# EAGLE board Servosolenoidvalve_of_Tanbo (EAGLE 9.6.2), part 1 of 2
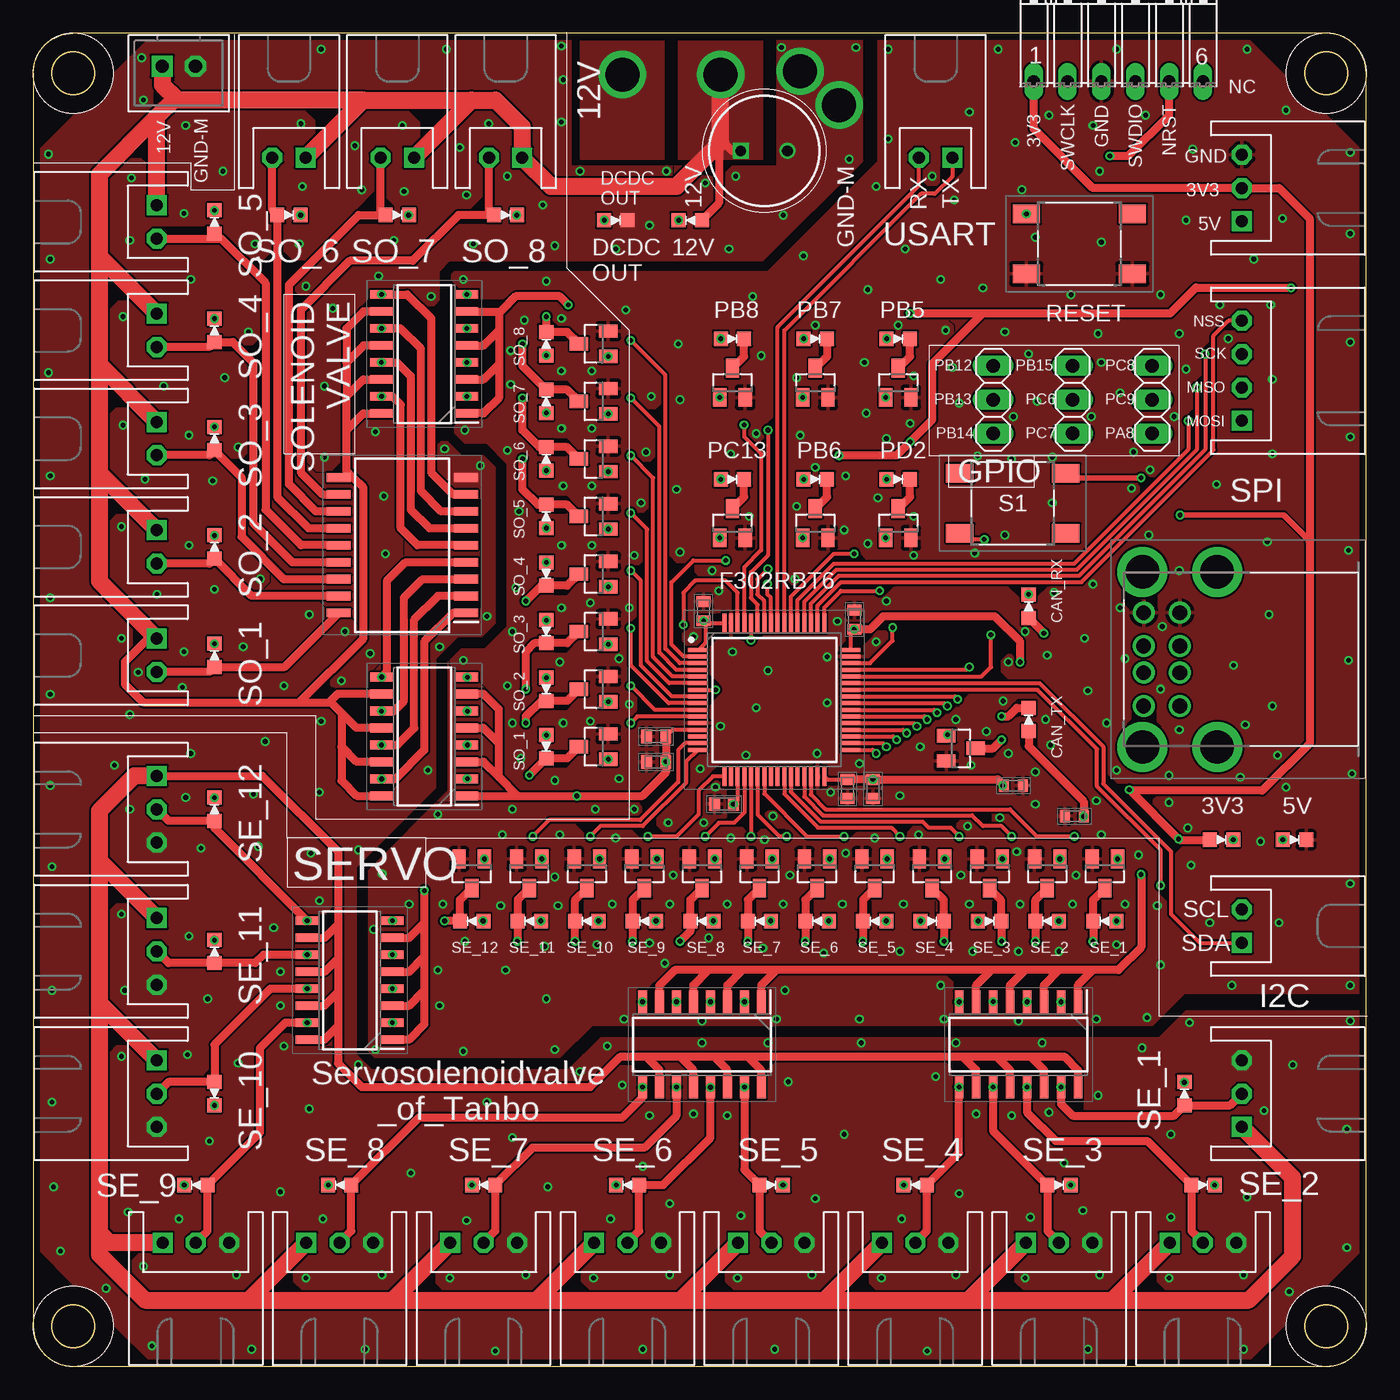
[diagram p0: board, top side]
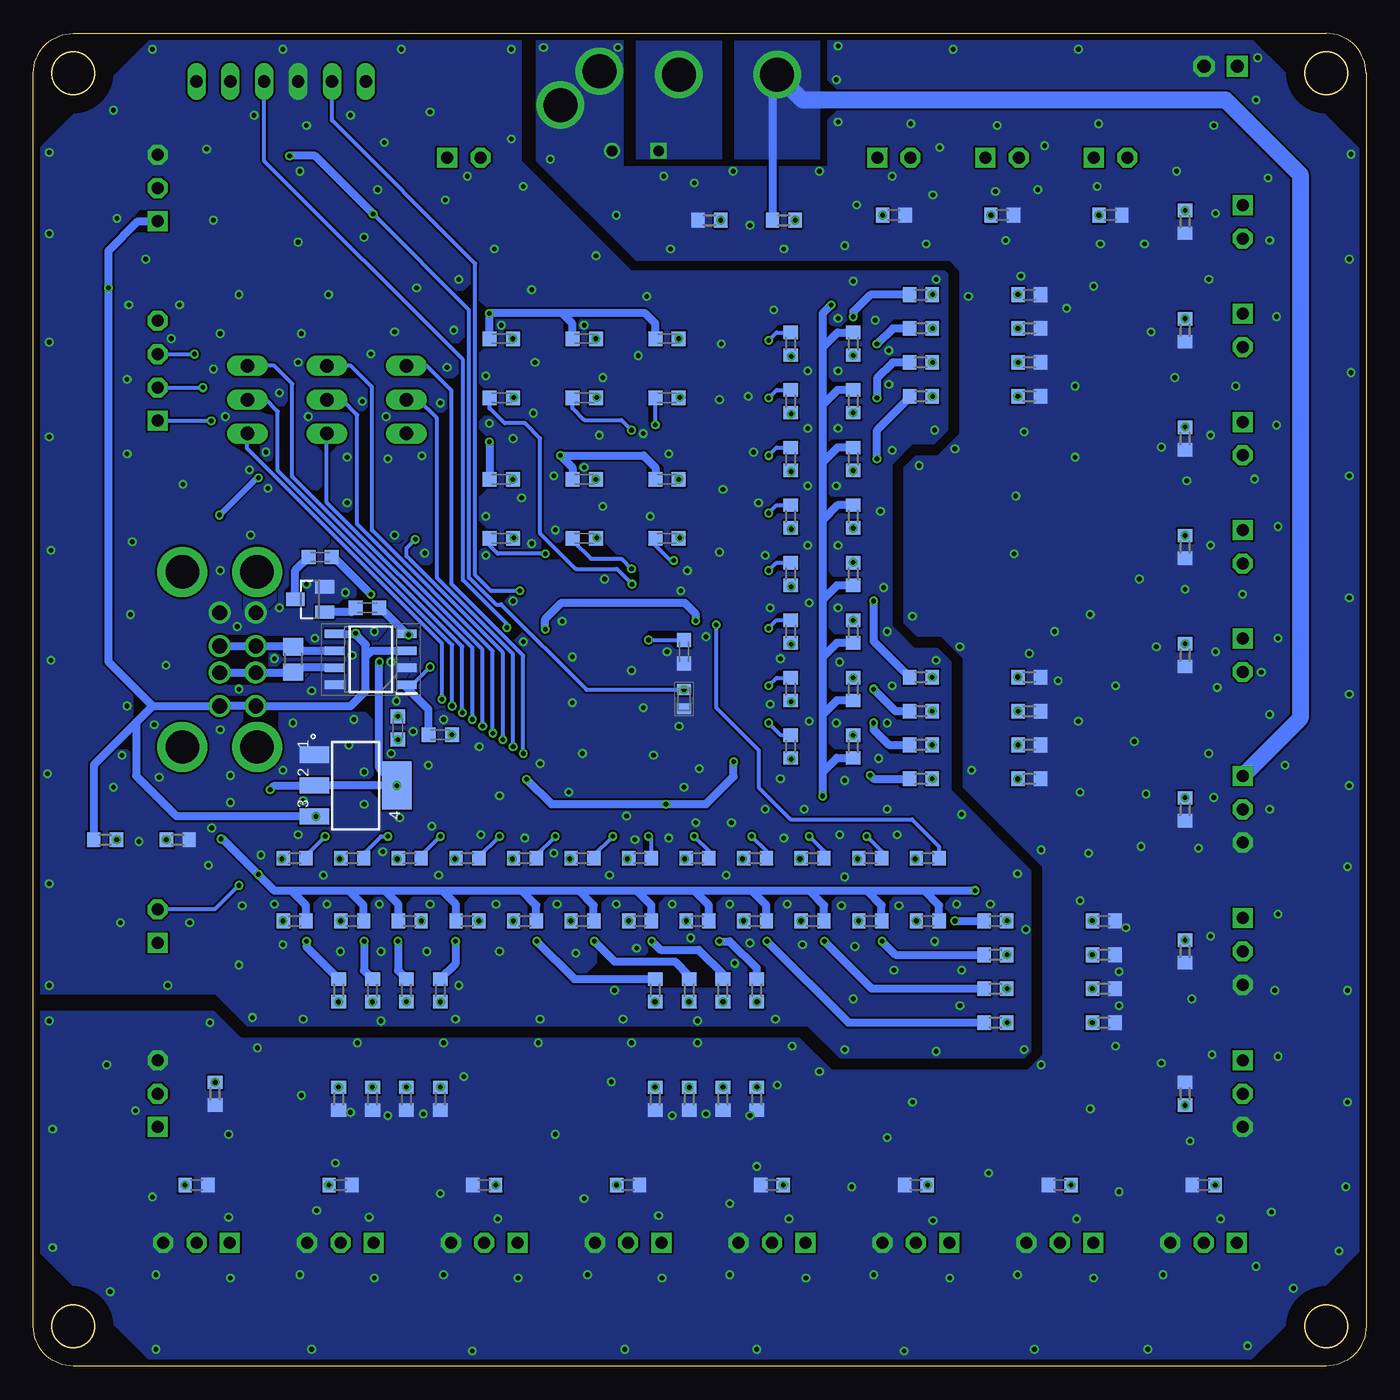
[diagram p1: board, bottom side, seen from below]

Size 100 x 100 mm. Coordinates in mm from the lower left corner, seen from the top.
Outline: 3,0 97,0 arc90 100,3 100,97 arc90 97,100 3,100 arc90 0,97 0,3 arc90 3,0
Outline: circle at 3,3 radius 1.6
Outline: circle at 3,97 radius 1.6
Outline: circle at 97,97 radius 1.6
Outline: circle at 97,3 radius 1.6
Copper layers (1*16): Top 0.035mm / dielectric 1.6mm / Bottom 0.035mm
Design rules "Elecrow_2-layer_PCB_eagle_rule": minimum track width 6mil, minimum drill 12mil, track to track 6mil, track to pad 6mil, pad to pad 6mil, via to via 8mil, smd to smd 0mil, copper to edge 20mil, drill to drill 10mil, minimum pad ring 6mil, minimum via ring 6mil, stop-mask expansion 0mil, vias tented up to drill 100mil, thermal gap 10mil
tRestrict: area 94,0 to 100,6; area 94,94 to 100,100; area 0,0 to 6,6; area 0,94 to 6,100; 340 lines
bRestrict: area 94,94 to 100,100; area 0,94 to 6,100; area 94,0 to 100,6; area 0,0 to 6,6; 281 lines

## Footprints (pad centres in the part's own frame; a part is rotated, then mirrored left to right if it is on the bottom)
CAPC1709X100N = smd 0.81 x 1.04: 1 -0.72,0; 2 0.72,0
CAPC1608X90N = smd 0.75 x 0.94: 1 -0.7,0; 2 0.7,0
CAPPRD350W60D825H1150 = drill 0.8 pad 1.2 square: 1 0,0 | drill 0.8 pad 1.2: 2 3.5,0
QFP50P1200X1200X160-64N = smd 1.475 x 0.3: 1 -5.738,3.75; 2 -5.738,3.25; 3 -5.738,2.75; 4 -5.738,2.25; 5 -5.738,1.75; 6 -5.738,1.25; 7 -5.738,0.75; 8 -5.738,0.25; 9 -5.738,-0.25; 10 -5.738,-0.75; 11 -5.738,-1.25; 12 -5.738,-1.75; 13 -5.738,-2.25; 14 -5.738,-2.75; 15 -5.738,-3.25; 16 -5.738,-3.75; 33 5.738,-3.75; 34 5.738,-3.25; 35 5.738,-2.75; 36 5.738,-2.25; 37 5.738,-1.75; 38 5.738,-1.25; 39 5.738,-0.75; 40 5.738,-0.25; 41 5.738,0.25; 42 5.738,0.75; 43 5.738,1.25; 44 5.738,1.75; 45 5.738,2.25; 46 5.738,2.75; 47 5.738,3.25; 48 5.738,3.75 | smd 0.3 x 1.475: 17 -3.75,-5.738; 18 -3.25,-5.738; 19 -2.75,-5.738; 20 -2.25,-5.738; 21 -1.75,-5.738; 22 -1.25,-5.738; 23 -0.75,-5.738; 24 -0.25,-5.738; 25 0.25,-5.738; 26 0.75,-5.738; 27 1.25,-5.738; 28 1.75,-5.738; 29 2.25,-5.738; 30 2.75,-5.738; 31 3.25,-5.738; 32 3.75,-5.738; 49 3.75,5.738; 50 3.25,5.738; 51 2.75,5.738; 52 2.25,5.738; 53 1.75,5.738; 54 1.25,5.738; 55 0.75,5.738; 56 0.25,5.738; 57 -0.25,5.738; 58 -0.75,5.738; 59 -1.25,5.738; 60 -1.75,5.738; 61 -2.25,5.738; 62 -2.75,5.738; 63 -3.25,5.738; 64 -3.75,5.738
SOIC127P600X175-8N = smd 1.5 x 0.65: 1 -2.7,1.905; 2 -2.7,0.635; 3 -2.7,-0.635; 4 -2.7,-1.905; 5 2.7,-1.905; 6 2.7,-0.635; 7 2.7,0.635; 8 2.7,1.905
SOP128P700X220-16N = smd 1.7 x 0.65: 1 -3.2,4.462; 2 -3.2,3.188; 3 -3.2,1.912; 4 -3.2,0.638; 5 -3.2,-0.638; 6 -3.2,-1.912; 7 -3.2,-3.188; 8 -3.2,-4.462; 9 3.2,-4.462; 10 3.2,-3.188; 11 3.2,-1.912; 12 3.2,-0.638; 13 3.2,0.638; 14 3.2,1.912; 15 3.2,3.188; 16 3.2,4.462
SOIC127P1030X245-18N = smd 1.8 x 0.65: 1 -4.775,5.08; 2 -4.775,3.81; 3 -4.775,2.54; 4 -4.775,1.27; 5 -4.775,0; 6 -4.775,-1.27; 7 -4.775,-2.54; 8 -4.775,-3.81; 9 -4.775,-5.08; 10 4.775,-5.08; 11 4.775,-3.81; 12 4.775,-2.54; 13 4.775,-1.27; 14 4.775,0; 15 4.775,1.27; 16 4.775,2.54; 17 4.775,3.81; 18 4.775,5.08
USB4AF203AS = drill 1.1 pad 1.65: 1 0,0; 2 2.5,0; 3 4.5,0; 4 7,0; 5 0,-2.71; 6 2.5,-2.71; 7 4.5,-2.71; 8 7,-2.71 | drill 2.5 pad 3.75: MH1 -3.07,0.09; MH2 10.07,0.09; MH3 -3.07,-5.51; MH4 10.07,-5.51
1X03 = drill 1.016 long: 1 -2.54,0; 2 0,0; 3 2.54,0
LED1608 = smd 1.05 x 1.08: A -0.875,0; K 0.875,0
SOT-23 = smd 1 x 1.4: 1 -0.95,-1.1; 2 0.95,-1.1; 3 0,1.1
1608 = smd 1.05 x 1.08: 1 -0.875,0; 2 0.875,0
R0603 = smd 1 x 1.1: 1 -0.85,0; 2 0.85,0
R0805 = smd 1.3 x 1.5: 1 -0.95,0; 2 0.95,0
SMD1608 = smd 1.05 x 1.08: 1 -0.875,0; 2 0.875,0
TSHAT25B219E = smd 2.05 x 1.4: A1 -3.975,2.25; B1 3.975,2.25; C1 -3.975,-2.25; D1 3.975,-2.25
06PA = drill 0.914 long: 1 -6.35,0; 2 -3.81,0; 3 -1.27,0; 4 1.27,0; 5 3.81,0; 6 6.35,0
SOT223 = smd 2.235 x 1.219: 1 -3.099,2.311; 2 -3.099,0; 3 -3.099,-2.311 | smd 2.2 x 3.6: 4 3.099,0
S2B-XH-A = drill 0.9 pad 1.5 square: 1 1.25,0 | drill 0.9 pad 1.5 octagon: 2 -1.25,0
S3B-XH-A = drill 0.9 pad 1.5 square: 1 2.5,0 | drill 0.9 pad 1.5 octagon: 2 0,0; 3 -2.5,0
S4B-XH-A = drill 0.9 pad 1.5 square: 1 3.75,0 | drill 0.9 pad 1.5 octagon: 2 1.25,0; 3 -1.25,0; 4 -3.75,0
B2B-XH-A = drill 1 pad 1.6 square: 1 1.25,0 | drill 1 pad 1.6 octagon: 2 -1.25,0

## Placement (x,y rotation side)
C1  100n  [CAPC1709X100N]  51.82,42.16 0 top
C2  10uF  [CAPC1608X90N]  73.53,43.56 180 top
C5  25PK470MEFC8X11.5  [CAPPRD350W60D825H1150]  53.09,91.19 0 top
C9  100n  [CAPC1709X100N]  61.59,56.01 270 top
C10  100n  [CAPC1709X100N]  50.29,56.64 270 top
C11  100n  [CAPC1709X100N]  61.09,43.31 90 top
C17  4.7u  [CAPC1709X100N]  62.99,43.31 90 top
C18  10n  [CAPC1709X100N]  46.74,47.24 0 top
C19  1u  [CAPC1709X100N]  46.74,45.34 0 top
C22  100n  [CAPC1608X90N]  78.11,41.27 0 top
C23  0.1u  [CAPC1709X100N]  51.18,50.04 90 bottom
IC1  STM32F302RBT6  [QFP50P1200X1200X160-64N]  55.59,50 0 top
IC2  NCV7351D1ER2G  [SOIC127P600X175-8N]  74.68,53.04 180 bottom
IC4  TLP293-4_GB  [SOP128P700X220-16N]  50.16,24.13 270 top
IC5  TLP293-4_GB  [SOP128P700X220-16N]  23.75,28.96 180 top
IC6  TD62083AFG,N,EL  [SOIC127P1030X245-18N]  27.69,61.59 180 top
IC7  TLP293-4_GB  [SOP128P700X220-16N]  29.34,47.24 180 top
IC8  TLP293-4_GB  [SOP128P700X220-16N]  29.34,75.95 180 top
IC9  TLP293-4_GB  [SOP128P700X220-16N]  73.91,24.13 270 top
J2  USB-4AF203AS  [USB4AF203AS]  83.31,49.53 90 top
JP1  [1X03]  83.95,72.52 90 top
JP2  [1X03]  77.98,72.52 90 top
JP3  [1X03]  72.01,72.52 90 top
LED1  LED1608  [LED1608]  13.59,53.34 90 top
LED2  LED1608  [LED1608]  94.61,39.5 0 top
LED3  LED1608  [LED1608]  89.15,39.5 0 top
LED4  LED1608  [LED1608]  13.59,61.47 90 top
LED5  LED1608  [LED1608]  13.59,69.6 90 top
LED6  LED1608  [LED1608]  86.36,20.45 90 top
LED7  LED1608  [LED1608]  67.44,33.4 0 top
LED8  LED1608  [LED1608]  87.76,13.59 0 top
LED9  LED1608  [LED1608]  13.59,77.72 90 top
LED10  LED1608  [LED1608]  13.59,85.85 90 top
LED11  LED1608  [LED1608]  19.18,86.36 0 top
LED12  LED1608  [LED1608]  27.3,86.36 0 top
LED13  LED1608  [LED1608]  35.43,86.36 0 top
LED14  LED1608  [LED1608]  64.9,66.55 0 top
LED15  LED1608  [LED1608]  64.9,77.09 0 top
LED16  LED1608  [LED1608]  58.67,66.55 0 top
LED17  LED1608  [LED1608]  58.67,77.09 0 top
LED18  LED1608  [LED1608]  76.96,13.59 0 top
LED19  LED1608  [LED1608]  66.17,13.59 180 top
LED20  LED1608  [LED1608]  55.37,13.59 0 top
LED21  LED1608  [LED1608]  38.48,68.07 90 top
LED22  LED1608  [LED1608]  38.48,72.39 90 top
LED23  LED1608  [LED1608]  38.48,76.71 90 top
LED24  LED1608  [LED1608]  38.48,46.48 270 top
LED25  LED1608  [LED1608]  38.48,50.8 270 top
LED26  LED1608  [LED1608]  38.48,55.12 270 top
LED27  LED1608  [LED1608]  38.48,59.44 270 top
LED28  LED1608  [LED1608]  44.58,13.59 180 top
LED29  LED1608  [LED1608]  52.45,77.09 0 top
LED30  LED1608  [LED1608]  33.78,13.59 180 top
LED31  LED1608  [LED1608]  22.99,13.59 180 top
LED32  LED1608  [LED1608]  41.53,33.4 180 top
LED33  LED1608  [LED1608]  63.12,33.4 180 top
LED34  LED1608  [LED1608]  37.21,33.4 180 top
LED35  LED1608  [LED1608]  80.39,33.4 180 top
LED36  LED1608  [LED1608]  54.48,33.4 180 top
LED37  LED1608  [LED1608]  76.07,33.4 180 top
LED38  LED1608  [LED1608]  50.16,33.4 180 top
LED39  LED1608  [LED1608]  38.48,63.75 90 top
LED40  LED1608  [LED1608]  52.45,66.55 0 top
LED41  LED1608  [LED1608]  49.28,85.98 180 top
LED42  LED1608  [LED1608]  58.8,33.4 180 top
LED43  LED1608  [LED1608]  32.89,33.4 180 top
LED44  LED1608  [LED1608]  71.75,33.4 0 top
LED45  LED1608  [LED1608]  45.85,33.4 180 top
LED46  LED1608  [LED1608]  12.19,13.59 180 top
LED47  LED1608  [LED1608]  13.59,20.45 270 top
LED48  LED1608  [LED1608]  13.59,31.11 90 top
LED49  LED1608  [LED1608]  13.59,41.78 90 top
LED50  LED1608  [LED1608]  43.69,85.98 0 top
LED51-G  LED1608  [LED1608]  74.68,48.51 90 top
LED52-Y  LED1608  [LED1608]  74.68,57.02 90 top
Q9  SOT-23_NMOS  [SOT-23]  69.6,46.35 270 top
Q10  SOT-23_NMOS  [SOT-23]  79.25,57.53 90 bottom
R1  10k  [1608]  51.18,53.59 270 bottom
R2  1k  [R0603]  94.61,39.5 0 bottom
R3  1k  [R0603]  89.15,39.5 0 bottom
R4  300  [R0603]  33.4,44.07 180 bottom
R5  120  [R0805]  80.52,53.04 270 bottom
R6  300  [R0603]  33.4,46.61 180 bottom
R7  300  [R0603]  33.4,49.15 180 bottom
R8  300  [R0603]  33.4,51.69 180 bottom
R9  10k  [SMD1608]  52.45,72.64 0 bottom
R10  1k  [SMD1608]  52.45,77.09 0 bottom
R11  10k  [SMD1608]  52.45,62.1 0 bottom
R12  1k  [R0603]  25.27,44.07 180 bottom
R13  1k  [R0603]  25.27,46.61 180 bottom
R14  1k  [R0603]  25.27,49.15 180 bottom
R15  1k  [R0603]  25.27,51.69 180 bottom
R16  1k  [R0603]  25.27,72.77 180 bottom
R17  1k  [R0603]  25.27,75.31 180 bottom
R18  1k  [R0603]  25.27,77.85 180 bottom
R19  1k  [R0603]  25.27,80.39 180 bottom
R20  1k  [SMD1608]  52.45,66.55 0 bottom
R21  300  [R0603]  33.4,72.77 180 bottom
R22  300  [R0603]  33.4,75.31 180 bottom
R23  300  [R0603]  33.4,77.85 180 bottom
R24  300  [R0603]  33.4,80.39 180 bottom
R25  10k  [R0603]  49.28,85.98 180 bottom
R26  300  [R0603]  27.81,25.78 180 bottom
R27  300  [R0603]  27.81,28.32 180 bottom
R28  300  [R0603]  27.81,30.86 180 bottom
R29  300  [R0603]  77.09,28.19 90 bottom
R30  300  [R0603]  74.55,28.19 90 bottom
R31  300  [R0603]  72.01,28.19 90 bottom
R32  300  [R0603]  69.47,28.19 90 bottom
R33  1k  [R0603]  77.09,20.07 90 bottom
R34  1k  [R0603]  74.55,20.07 90 bottom
R35  1k  [R0603]  72.01,20.07 90 bottom
R36  1k  [R0603]  69.47,20.07 90 bottom
R37  300  [R0603]  53.34,28.19 90 bottom
R38  300  [R0603]  50.8,28.19 90 bottom
R39  300  [R0603]  48.26,28.19 90 bottom
R40  300  [R0603]  45.72,28.19 90 bottom
R41  1k  [R0603]  53.34,20.07 90 bottom
R42  1k  [R0603]  50.8,20.07 90 bottom
R43  1k  [R0603]  48.26,20.07 90 bottom
R44  1k  [R0603]  45.72,20.07 90 bottom
R45  1k  [R0603]  38.48,46.48 90 bottom
R46  10k  [R0603]  13.59,53.34 270 bottom
R47  10k  [R0603]  13.59,61.47 270 bottom
R48  10k  [R0603]  13.59,69.6 270 bottom
R49  10k  [R0603]  13.59,77.72 270 bottom
R50  10k  [R0603]  13.59,85.85 270 bottom
R51  10k  [R0603]  19.18,86.36 0 bottom
R52  10k  [R0603]  27.3,86.36 0 bottom
R53  10k  [R0603]  35.43,86.36 0 bottom
R54  1k  [R0603]  43.18,46.48 270 bottom
R55  1k  [R0603]  38.48,50.8 90 bottom
R56  1k  [R0603]  43.18,50.8 270 bottom
R57  1k  [R0603]  38.48,55.12 90 bottom
R58  1k  [R0603]  43.18,55.12 270 bottom
R59  10k  [SMD1608]  64.9,62.1 0 bottom
R60  1k  [SMD1608]  64.9,66.55 0 bottom
R61  10k  [SMD1608]  64.9,72.64 0 bottom
R62  1k  [SMD1608]  64.9,77.09 0 bottom
R63  10k  [SMD1608]  58.67,62.1 0 bottom
R64  1k  [SMD1608]  58.67,66.55 0 bottom
R65  10k  [SMD1608]  58.67,72.64 0 bottom
R66  1k  [SMD1608]  58.67,77.09 0 bottom
R67  1k  [R0603]  38.48,59.44 90 bottom
R68  1k  [R0603]  43.18,59.44 270 bottom
R69  1k  [R0603]  38.48,63.75 270 bottom
R70  1k  [R0603]  43.18,63.75 270 bottom
R71  1k  [R0603]  38.48,68.07 270 bottom
R72  1k  [R0603]  43.18,68.07 270 bottom
R73  1k  [R0603]  38.48,72.39 270 bottom
R74  1k  [R0603]  43.18,72.39 270 bottom
R75  1k  [R0603]  38.48,76.71 270 bottom
R76  1k  [R0603]  43.18,76.71 270 bottom
R77  1k  [R0603]  80.39,33.4 180 bottom
R78  1k  [R0603]  86.36,20.45 270 bottom
R79  1k  [R0603]  87.76,13.59 0 bottom
R80  1k  [R0603]  76.96,13.59 0 bottom
R81  1k  [R0603]  66.17,13.59 180 bottom
R82  1k  [R0603]  55.37,13.59 0 bottom
R83  1k  [R0603]  44.58,13.59 180 bottom
R84  1k  [R0603]  33.78,13.59 180 bottom
R85  1k  [R0603]  22.99,13.59 180 bottom
R86  1k  [R0603]  80.39,38.1 180 bottom
R87  1k  [R0603]  54.48,33.4 180 bottom
R88  1k  [R0603]  54.48,38.1 180 bottom
R89  1k  [R0603]  76.07,33.4 180 bottom
R90  1k  [R0603]  76.07,38.1 180 bottom
R91  1k  [R0603]  50.16,33.4 180 bottom
R92  1k  [R0603]  50.16,38.1 180 bottom
R93  1k  [R0603]  67.44,33.4 0 bottom
R94  1k  [R0603]  67.44,38.1 180 bottom
R95  1k  [R0603]  41.53,33.4 180 bottom
R96  1k  [R0603]  41.53,38.1 180 bottom
R97  1k  [R0603]  63.12,33.4 180 bottom
R98  1k  [R0603]  63.12,38.1 180 bottom
R99  1k  [R0603]  37.21,33.4 180 bottom
R100  1k  [R0603]  37.21,38.1 180 bottom
R101  300  [R0603]  27.81,33.4 180 bottom
R102  1k  [R0603]  19.68,25.78 180 bottom
R103  1k  [R0603]  19.68,28.32 180 bottom
R104  1k  [R0603]  19.68,30.86 180 bottom
R105  1k  [R0603]  19.68,33.4 180 bottom
R106  1k  [R0603]  71.75,33.4 0 bottom
R107  1k  [R0603]  71.75,38.1 180 bottom
R108  1k  [R0603]  45.85,33.4 180 bottom
R109  1k  [R0603]  45.85,38.1 180 bottom
R110  1k  [R0603]  58.8,33.4 180 bottom
R111  1k  [R0603]  58.8,38.1 180 bottom
R112  1k  [R0603]  32.89,33.4 180 bottom
R113  1k  [R0603]  32.89,38.1 180 bottom
R114  1k  [R0603]  12.19,13.59 180 bottom
R115  1k  [R0603]  13.59,20.45 90 bottom
R116  1k  [R0603]  13.59,31.11 270 bottom
R117  1k  [R0603]  13.59,41.78 270 bottom
R118  1k  [R0603]  43.69,85.98 0 bottom
R119  1k  [SMD1608]  72.64,47.88 270 bottom
R120  1k  [SMD1608]  78.49,60.71 180 bottom
R121  10k  [SMD1608]  69.47,47.37 180 bottom
R122  10k  [SMD1608]  74.93,56.9 0 bottom
S1  TSHA-T-2.5B2-19E  [TSHAT25B219E]  73.48,64.74 0 top
S2  TSHA-T-2.5B2-19E  [TSHAT25B219E]  78.49,84.2 0 top
SL1  [06PA]  81.41,96.39 0 top
TR1  2SC2712GR  [SOT-23]  42.04,59.44 90 top
TR2  2SC2712GR  [SOT-23]  80.39,36.96 180 top
TR3  2SC2712GR  [SOT-23]  54.48,36.96 180 top
TR4  2SC2712GR  [SOT-23]  76.07,36.96 180 top
TR5  2SC2712GR  [SOT-23]  42.04,63.75 90 top
TR6  2SC2712GR  [SOT-23]  42.04,68.07 90 top
TR7  2SC2712GR  [SOT-23]  42.04,72.39 90 top
TR8  2SC2712GR  [SOT-23]  42.04,76.71 90 top
TR9  2SC2712GR  [SOT-23]  42.04,46.48 90 top
TR10  2SC2712GR  [SOT-23]  42.04,50.8 90 top
TR11  2SC2712GR  [SOT-23]  42.04,55.12 90 top
TR12  2SC2712GR  [SOT-23]  64.9,63.25 0 top
TR13  2SC2712GR  [SOT-23]  64.9,73.79 0 top
TR14  2SC2712GR  [SOT-23]  58.67,63.25 0 top
TR15  2SC2712GR  [SOT-23]  50.16,36.96 180 top
TR16  2SC2712GR  [SOT-23]  67.44,36.96 180 top
TR17  2SC2712GR  [SOT-23]  58.67,73.79 0 top
TR18  2SC2712GR  [SOT-23]  41.53,36.96 180 top
TR19  2SC2712GR  [SOT-23]  63.12,36.96 180 top
TR20  2SC2712GR  [SOT-23]  37.21,36.96 180 top
TR21  2SC2712GR  [SOT-23]  52.45,73.79 0 top
TR22  2SC2712GR  [SOT-23]  52.45,63.25 0 top
TR23  2SC2712GR  [SOT-23]  71.75,36.96 180 top
TR24  2SC2712GR  [SOT-23]  45.85,36.96 180 top
TR25  2SC2712GR  [SOT-23]  58.8,36.96 180 top
TR26  2SC2712GR  [SOT-23]  32.89,36.96 180 top
U1  LD1117S33CTR  [SOT223]  75.82,43.56 0 bottom
X1  S2B-XH-A  [S2B-XH-A]  9.27,77.72 90 top
X2  S3B-XH-A  [S3B-XH-A]  22.99,9.27 180 top
X3  S3B-XH-A  [S3B-XH-A]  33.78,9.27 180 top
X4  S3B-XH-A  [S3B-XH-A]  9.27,41.78 90 top
X5  S2B-XH-A  [S2B-XH-A]  9.27,53.34 90 top
X6  S2B-XH-A  [S2B-XH-A]  9.27,61.47 90 top
X7  S2B-XH-A  [S2B-XH-A]  9.27,69.6 90 top
X8  S4B-XH-A  [S4B-XH-A]  90.68,74.68 270 top
X9  S2B-XH-A  [S2B-XH-A]  9.27,85.85 90 top
X10  S2B-XH-A  [S2B-XH-A]  19.18,90.68 0 top
X11  S2B-XH-A  [S2B-XH-A]  27.3,90.68 0 top
X12  S2B-XH-A  [S2B-XH-A]  35.43,90.68 0 top
X13  S3B-XH-A  [S3B-XH-A]  9.27,31.11 90 top
X14  S3B-XH-A  [S3B-XH-A]  9.27,20.45 90 top
X15  S3B-XH-A  [S3B-XH-A]  12.19,9.27 180 top
X16  S3B-XH-A  [S3B-XH-A]  44.58,9.27 180 top
X17  S3B-XH-A  [S3B-XH-A]  55.37,9.27 180 top
X18  S2B-XH-A  [S2B-XH-A]  67.69,90.68 0 top
X19  S2B-XH-A  [S2B-XH-A]  90.68,33.02 270 top
X20  S3B-XH-A  [S3B-XH-A]  66.17,9.27 180 top
X21  S3B-XH-A  [S3B-XH-A]  76.96,9.27 180 top
X22  S3B-XH-A  [S3B-XH-A]  90.68,88.39 270 top
X23  S3B-XH-A  [S3B-XH-A]  87.76,9.27 180 top
X24  S3B-XH-A  [S3B-XH-A]  90.68,20.45 270 top
X25  B2B-XH-A  [B2B-XH-A]  10.92,97.54 180 top

## Library data of the parts
C1 C9-C11 C17-C19 C23 = SamacSys_Parts; DESCRIPTION: 0603 (1608M) 47uF MLCC 4V dc +/-20% SMD; HEIGHT: 1mm; MANUFACTURER_NAME: TAIYO YUDEN; MANUFACTURER_PART_NUMBER: AMK107BBJ476MA-RE; MOUSER_PART_NUMBER: 963-AMK107BBJ476MARE; MOUSER_PRICE-STOCK: https://www.mouser.com/Search/Refine.aspx?Keyword=963-AMK107BBJ476MARE; RS_PART_NUMBER: 1843762P; RS_PRICE-STOCK: http://uk.rs-online.com/web/p/products/1843762P
C2 C22 = SamacSys_Parts; DESCRIPTION: Murata 1608 GRM 10000nF Ceramic Multilayer Capacitor, 10 V dc, +85C, B Dielectric, +/-10%; HEIGHT: 0.9mm; MANUFACTURER_NAME: Murata Electronics; MANUFACTURER_PART_NUMBER: GRM188B31A106KE69D; RS_PART_NUMBER: 8847157P; RS_PRICE-STOCK: http://uk.rs-online.com/web/p/products/8847157P
C5 = SamacSys_Parts; DESCRIPTION: Rubycon 470uF 25 V dc Aluminium Electrolytic Capacitor, PK Series 2000h 8 Dia. x 11.5mm; HEIGHT: 11.5mm; MANUFACTURER_NAME: Rubycon; MANUFACTURER_PART_NUMBER: 25PK470MEFC8X11.5; MOUSER_PART_NUMBER: 232-25PK470MEFC8X115; MOUSER_PRICE-STOCK: https://www.mouser.co.uk/ProductDetail/Rubycon/25PK470MEFC8X115?qs=T3oQrply3y%252BFwMonqVFqXg%3D%3D
IC1 = SamacSys_Parts; ARROW_PART_NUMBER: STM32F302RBT6; ARROW_PRICE-STOCK: https://www.arrow.com/en/products/stm32f302rbt6/stmicroelectronics; DESCRIPTION: STMicroelectronics, STM32F302RBT6 STM32F302RBT6, 32 bit ARM Cortex M4 MCU 72MHz 128 kB Flash, 32 kB RAM, USB CAN I2C 64-Pin LQFP; HEIGHT: 1.6mm; MANUFACTURER_NAME: STMicroelectronics; MANUFACTURER_PART_NUMBER: STM32F302RBT6; MOUSER_PART_NUMBER: 511-STM32F302RBT6; MOUSER_PRICE-STOCK: https://www.mouser.co.uk/ProductDetail/STMicroelectronics/STM32F302RBT6?qs=MgMGkPeFqc%252BEgXCc%2F%2FVW1w%3D%3D
IC2 = SamacSys_Parts; ARROW_PART_NUMBER: NCV7351D1ER2G; ARROW_PRICE-STOCK: https://www.arrow.com/en/products/ncv7351d1er2g/on-semiconductor; DESCRIPTION: ON Semiconductor NCV7351D1ER2G, CAN Transceiver 1Mbit/s 1-channel ISO 11898-2, 8-Pin SOIC; HEIGHT: 1.75mm; MANUFACTURER_NAME: ON Semiconductor; MANUFACTURER_PART_NUMBER: NCV7351D1ER2G; MOUSER_PART_NUMBER: 863-NCV7351D1ER2G; MOUSER_PRICE-STOCK: https://www.mouser.co.uk/ProductDetail/ON-Semiconductor/NCV7351D1ER2G?qs=l5F7KFZg3O5tNFBk2wxDRg%3D%3D
IC4 IC5 IC7-IC9 = SamacSys_Parts; DESCRIPTION: TOSHIBA - TLP293-4(GB - OPTOCOUPLER, PHOTOTRANS, 3.75KV, SOIC-16; HEIGHT: 2.2mm; MANUFACTURER_NAME: Toshiba; MANUFACTURER_PART_NUMBER: TLP293-4(GB
IC6 = SamacSys_Parts; ARROW_PART_NUMBER: TD62083AFG,N,EL; ARROW_PRICE-STOCK: https://www.arrow.com/en/products/td62083afgnel/toshiba; DESCRIPTION: Gate Drivers; HEIGHT: 2.45mm; MANUFACTURER_NAME: Toshiba; MANUFACTURER_PART_NUMBER: TD62083AFG,N,EL; MOUSER_PART_NUMBER: N/A; MOUSER_PRICE-STOCK: https://www.mouser.co.uk/ProductDetail/Toshiba/TD62083AFGNEL?qs=rsevcuukUAxB55Ang1tTdQ%3D%3D
J2 = SamacSys_Parts; DESCRIPTION: USB Connector, A type Female, Dual Port 4P x 2 Stacked, Right Angle type.; HEIGHT: 15.5mm; MANUFACTURER_NAME: Useconn Electronics; MANUFACTURER_PART_NUMBER: USB-4AF203AS
JP1-JP3 = pinhead
LED1-LED50 LED51-G LED52-Y R9-R11 R20 R59-R66 R119-R122 = generic
Q9 Q10 TR1-TR26 = maya_smd
R1 = 1608
R2 R3 R25 R118 = audio amplifier example
R4-R8 R12-R19 R21-R24 R26-R58 R67-R117 = rcl; SPICEPREFIX: R
S1 S2 = SamacSys_Parts; DESCRIPTION: Switch; HEIGHT: 2.5mm; MANUFACTURER_NAME: Akizuki Denshi Tsusho; MANUFACTURER_PART_NUMBER: TSHA-T-2.5B2-19E
SL1 = con-amp-quick; OC_FARNELL: unknown; OC_NEWARK: unknown
U1 = LD1117S33CTR; AVAILABILITY: Unavailable; DESCRIPTION: LD1117 Series 1300 mA 3.3 V Fixed Output Positive Voltage LDO Regulator- SOT-223; MF: STMicroelectronics; MP: LD1117S33CTR; PACKAGE: SOT-223 STMicroelectronics; PRICE: None
X1-X7 X9-X25 = con-JST_XH
X8 = con-JST XH

## Nets
3V3: C1.2 C2.2 C9.2 C10.2 C11.2 C17.2 C18.2 C19.2 IC1.1 IC1.13 IC1.19 IC1.32 IC1.48 IC1.64 IC4.1 IC4.3 IC4.5 IC4.7 IC5.1 IC5.3 IC5.5 IC5.7 IC7.1 IC7.3 IC7.5 IC7.7 IC8.1 IC8.3 IC8.5 IC8.7 IC9.1 IC9.3 IC9.5 IC9.7 LED3.A R45.1 R55.1 R57.1 R67.1 R69.1 R71.1 R73.1 R75.1 R77.1 R87.1 R89.1 R91.1 R93.1 R95.1 R97.1 R99.1 R106.1 R108.1 R110.1 R112.1 S1.B1 SL1.1 U1.2 U1.4 X22.2
5V: C22.2 IC2.3 IC2.5 J2.1 J2.5 LED51-G.A LED52-Y.A R2.1 R10.1 R20.1 R60.1 R62.1 R64.1 R66.1 U1.3 X22.1
12V: C5.1 IC6.10 IC7.10 IC7.12 IC7.14 IC7.16 IC8.10 IC8.12 IC8.14 IC8.16 LED41.A X1.1 X5.1 X6.1 X7.1 X9.1 X10.1 X11.1 X12.1 X25.1
CAN_RX: IC1.44 IC2.4 R122.2
CAN_TX: IC1.45 IC2.1 R121.2
CANH: IC2.7 J2.2 J2.6 R5.2
CANL: IC2.6 J2.3 J2.7 R5.1
CATHODE-SE_1: LED35.K R29.2 TR2.3
CATHODE-SE_2: LED37.K R30.2 TR4.3
CATHODE-SE_3: LED44.K R31.2 TR23.3
CATHODE-SE_4: LED7.K R32.2 TR16.3
CATHODE-SE_5: LED33.K R37.2 TR19.3
CATHODE-SE_6: LED42.K R38.2 TR25.3
CATHODE-SE_7: LED36.K R39.2 TR3.3
CATHODE-SE_8: LED38.K R40.2 TR15.3
CATHODE-SE_9: LED45.K R26.2 TR24.3
CATHODE-SE_10: LED32.K R27.2 TR18.3
CATHODE-SE_11: LED34.K R28.2 TR20.3
CATHODE-SE_12: LED43.K R101.2 TR26.3
CATHODE-SO_1: LED24.K R4.2 TR9.3
CATHODE-SO_2: LED25.K R6.2 TR10.3
CATHODE-SO_3: LED26.K R7.2 TR11.3
CATHODE-SO_4: LED27.K R8.2 TR1.3
CATHODE-SO_5: LED39.K R21.2 TR5.3
CATHODE-SO_6: LED21.K R22.2 TR6.3
CATHODE-SO_7: LED22.K R23.2 TR7.3
CATHODE-SO_8: LED23.K R24.2 TR8.3
DCDC_OUT: IC4.10 IC4.12 IC4.14 IC4.16 IC5.10 IC5.12 IC5.14 IC5.16 IC9.10 IC9.12 IC9.14 IC9.16 R118.1 X2.1 X3.1 X4.1 X13.1 X14.1 X15.1 X16.1 X17.1 X20.1 X21.1 X23.1 X24.1
GND: C1.1 C2.1 C9.1 C10.1 C11.1 C17.1 C18.1 C19.1 C22.1 C23.1 IC1.12 IC1.31 IC1.47 IC1.63 IC2.2 IC2.8 J2.4 J2.8 LED2.K Q9.2 Q10.2 R1.2 R3.2 S2.C1 S2.D1 SL1.3 TR1.2 TR2.2 TR3.2 TR4.2 TR5.2 TR6.2 TR7.2 TR8.2 TR9.2 TR10.2 TR11.2 TR12.2 TR13.2 TR14.2 TR15.2 TR16.2 TR17.2 TR18.2 TR19.2 TR20.2 TR21.2 TR22.2 TR23.2 TR24.2 TR25.2 TR26.2 U1.1 X22.3
GND-M: C5.2 IC6.9 LED50.K R12.1 R13.1 R14.1 R15.1 R16.1 R17.1 R18.1 R19.1 R25.2 R33.1 R34.1 R35.1 R36.1 R41.1 R42.1 R43.1 R44.1 R46.2 R47.2 R48.2 R49.2 R50.2 R51.2 R52.2 R53.2 R78.2 R79.2 R80.2 R81.2 R82.2 R83.2 R84.2 R85.2 R102.1 R103.1 R104.1 R105.1 R114.2 R115.2 R116.2 R117.2 X2.3 X3.3 X4.3 X13.3 X14.3 X15.3 X16.3 X17.3 X20.3 X21.3 X23.3 X24.3 X25.2
N$1: IC4.2 R37.1
N$2: IC4.4 R38.1
N$3: IC4.6 R39.1
N$4: IC7.2 R4.1
N$5: IC7.4 R6.1
N$6: IC7.6 R7.1
N$7: LED2.A R2.2
N$8: LED3.K R3.1
N$9: IC4.8 R40.1
N$10: IC7.8 R8.1
N$11: LED24.A R45.2
N$12: LED25.A R55.2
N$13: LED26.A R57.2
N$14: LED27.A R67.2
N$15: IC1.60 R1.1
N$16: IC8.2 R21.1
N$17: IC8.4 R22.1
N$18: R54.2 TR9.1
N$19: LED39.A R69.2
N$20: R68.2 TR1.1
N$21: LED21.A R71.2
N$22: IC8.6 R23.1
N$23: IC8.8 R24.1
N$24: LED22.A R73.2
N$25: LED23.A R75.2
N$26: R86.2 TR2.1
N$27: R88.2 TR3.1
N$28: IC9.2 R29.1
N$29: IC9.4 R30.1
N$30: IC9.6 R31.1
N$31: IC9.8 R32.1
N$32: R70.2 TR5.1
N$33: R90.2 TR4.1
N$34: R72.2 TR6.1
N$35: R74.2 TR7.1
N$36: R92.2 TR15.1
N$37: R94.2 TR16.1
N$38: R96.2 TR18.1
N$39: R76.2 TR8.1
N$40: R98.2 TR19.1
N$41: R56.2 TR10.1
N$42: R100.2 TR20.1
N$43: IC5.2 R26.1
N$44: R58.2 TR11.1
N$45: LED1.K R46.1
N$46: LED4.K R47.1
N$47: LED5.K R48.1
N$48: LED9.K R49.1
N$49: LED10.K R50.1
N$50: LED11.K R51.1
N$51: LED12.K R52.1
N$52: LED13.K R53.1
N$53: LED6.K R78.1
N$54: LED8.K R79.1
N$55: R59.2 TR12.1
N$56: LED14.K TR12.3
N$57: LED14.A R60.2
N$58: R61.2 TR13.1
N$59: LED15.K TR13.3
N$60: LED15.A R62.2
N$61: R63.2 TR14.1
N$62: LED16.K TR14.3
N$63: LED16.A R64.2
N$64: R65.2 TR17.1
N$65: LED17.K TR17.3
N$66: LED17.A R66.2
N$67: LED18.K R80.1
N$68: LED19.K R81.1
N$69: LED20.K R82.1
N$70: LED28.K R83.1
N$71: LED30.K R84.1
N$72: LED31.K R85.1
N$73: LED35.A R77.2
N$74: IC5.4 R27.1
N$75: LED36.A R87.2
N$76: IC5.6 R28.1
N$77: LED37.A R89.2
N$78: IC5.8 R101.1
N$79: LED38.A R91.2
N$80: LED7.A R93.2
N$81: LED32.A R95.2
N$82: LED33.A R97.2
N$83: LED34.A R99.2
N$84: R9.2 TR21.1
N$85: R107.2 TR23.1
N$86: LED29.K TR21.3
N$87: R109.2 TR24.1
N$88: LED29.A R10.2
N$89: R11.2 TR22.1
N$90: LED40.K TR22.3
N$91: LED40.A R20.2
N$92: LED41.K R25.1
N$93: R111.2 TR25.1
N$94: R113.2 TR26.1
N$95: LED44.A R106.2
N$96: LED45.A R108.2
N$97: LED42.A R110.2
N$98: LED43.A R112.2
N$99: LED46.K R114.1
N$100: LED47.K R115.1
N$101: LED48.K R116.1
N$102: LED49.K R117.1
N$103: Q9.1 R121.1
N$104: Q10.1 R122.1
N$105: LED51-G.K R119.1
N$106: LED52-Y.K R120.1
N$107: LED50.A R118.2
N$108: Q9.3 R119.2
N$109: Q10.3 R120.2
N$113: S1.D1
NRST: C23.2 IC1.7 S2.A1 SL1.5
PA8: IC1.41 JP1.1
PB5: IC1.57 R61.1
PB6: IC1.58 R63.1
PB7: IC1.59 R65.1
PB8: IC1.61 R9.1
PB12: IC1.33 JP3.3
PB13: IC1.34 JP3.2
PB14: IC1.35 S1.C1
PB15: IC1.36 JP2.3
PC6: IC1.37 JP2.2
PC7: IC1.38 JP2.1
PC8: IC1.39 JP1.3
PC9: IC1.40 JP1.2
PC13: IC1.2 R11.1
PD2: IC1.54 R59.1
SCL: IC1.42 X19.2
SDA: IC1.43 X19.1
SERVO_1: IC9.15 LED6.A R33.2 X24.2
SERVO_2: IC9.13 LED8.A R34.2 X23.2
SERVO_3: IC9.11 LED18.A R35.2 X21.2
SERVO_4: IC9.9 LED19.A R36.2 X20.2
SERVO_5: IC4.15 LED20.A R41.2 X17.2
SERVO_6: IC4.13 LED28.A R42.2 X16.2
SERVO_7: IC4.11 LED30.A R43.2 X3.2
SERVO_8: IC4.9 LED31.A R44.2 X2.2
SERVO_9: IC5.15 LED46.A R102.2 X15.2
SERVO_10: IC5.13 LED47.A R103.2 X14.2
SERVO_11: IC5.11 LED48.A R104.2 X13.2
SERVO_12: IC5.9 LED49.A R105.2 X4.2
SIGNAL-SE_1: IC1.30 R86.1
SIGNAL-SE_2: IC1.29 R90.1
SIGNAL-SE_3: IC1.27 R107.1
SIGNAL-SE_4: IC1.26 R94.1
SIGNAL-SE_5: IC1.23 R98.1
SIGNAL-SE_6: IC1.22 R111.1
SIGNAL-SE_7: IC1.21 R88.1
SIGNAL-SE_8: IC1.20 R92.1
SIGNAL-SE_9: IC1.17 R109.1
SIGNAL-SE_10: IC1.16 R96.1
SIGNAL-SE_11: IC1.15 R100.1
SIGNAL-SE_12: IC1.62 R113.1
SIGNAL-SO_1: IC1.11 R54.1
SIGNAL-SO_2: IC1.10 R56.1
SIGNAL-SO_3: IC1.9 R58.1
SIGNAL-SO_4: IC1.8 R68.1
SIGNAL-SO_5: IC1.6 R70.1
SIGNAL-SO_6: IC1.5 R72.1
SIGNAL-SO_7: IC1.4 R74.1
SIGNAL-SO_8: IC1.3 R76.1
SIGNAL_N1: IC6.1 IC7.15 R12.2
SIGNAL_N2: IC6.2 IC7.13 R13.2
SIGNAL_N3: IC6.3 IC7.11 R14.2
SIGNAL_N4: IC6.4 IC7.9 R15.2
SIGNAL_N5: IC6.5 IC8.15 R16.2
SIGNAL_N6: IC6.6 IC8.13 R17.2
SIGNAL_N7: IC6.7 IC8.11 R18.2
SIGNAL_N8: IC6.8 IC8.9 R19.2
SOLENOID_1: IC6.18 LED1.A X5.2
SOLENOID_2: IC6.17 LED4.A X6.2
SOLENOID_3: IC6.16 LED5.A X7.2
SOLENOID_4: IC6.15 LED9.A X1.2
SOLENOID_5: IC6.14 LED10.A X9.2
SOLENOID_6: IC6.13 LED11.A X10.2
SOLENOID_7: IC6.12 LED12.A X11.2
SOLENOID_8: IC6.11 LED13.A X12.2
SPI_MISO: IC1.52 X8.2
SPI_MOSI: IC1.53 X8.1
SPI_NSS: IC1.50 X8.4
SPI_SCK: IC1.51 X8.3
SWCLK: IC1.49 SL1.2
SWDIO: IC1.46 SL1.4
SWO: SL1.6
USART_RX: IC1.56 X18.2
USART_TX: IC1.55 X18.1